# EAGLE board CT_schematic (EAGLE 7.6.0)

Size 100 x 80 mm. Coordinates in mm from the lower left corner, seen from the top.
Outline: 0,0 100,0 100,80 0,80 0,0
Copper layers (1*16): Top 0.035mm / dielectric 1.5mm / Bottom 0.035mm
Design rules "default": minimum track width 10mil, minimum drill 24mil, track to track 8mil, track to pad 8mil, pad to pad 8mil, via to via 8mil, smd to smd 8mil, copper to edge 40mil, drill to drill 8mil, minimum pad ring 10mil, minimum via ring 8mil, stop-mask expansion 4mil, vias tented up to drill 0mil, thermal gap 10mil

## Footprints (pad centres in the part's own frame; a part is rotated, then mirrored left to right if it is on the bottom)
C0603 = smd 0.8 x 0.8: 1 -0.762,0; 2 0.762,0
C0402 = smd 0.5 x 0.5: 1 -0.508,0; 2 0.508,0
C0805 = smd 1.2 x 1.3: 1 -1.016,0; 2 1.016,0
EXV-9B = smd 2.718 x 1.778: 1 -2.108,0; 2 2.108,0
EXV-9H = smd 3.505 x 1.676: 1 -2.857,0; 2 2.857,0
L0603 = smd 0.8 x 0.8: 1 -0.762,0; 2 0.762,0
L1210 = smd 1.2 x 2.5: 1 -1.524,0; 2 1.524,0
PJ-037B_PACKAGE = drill 3.7 square: 1 12,0 | drill 3.2 square: 2 6,0
R0603 = smd 0.8 x 0.8: 1 -0.762,0; 2 0.762,0
TFBGA64 = smd 0.35 x 0.35: A1 -1.75,1.75; A2 -1.25,1.75; A3 -0.75,1.75; A4 -0.25,1.75; A5 0.25,1.75; A6 0.75,1.75; A7 1.25,1.75; A8 1.75,1.75; B1 -1.75,1.25; B2 -1.25,1.25; B3 -0.75,1.25; B4 -0.25,1.25; B5 0.25,1.25; B6 0.75,1.25; B7 1.25,1.25; B8 1.75,1.25; C1 -1.75,0.75; C2 -1.25,0.75; C3 -0.75,0.75; C4 -0.25,0.75; C5 0.25,0.75; C6 0.75,0.75; C7 1.25,0.75; C8 1.75,0.75; D1 -1.75,0.25; D2 -1.25,0.25; D3 -0.75,0.25; D4 -0.25,0.25; D5 0.25,0.25; D6 0.75,0.25; D7 1.25,0.25; D8 1.75,0.25; E1 -1.75,-0.25; E2 -1.25,-0.25; E3 -0.75,-0.25; E4 -0.25,-0.25; E5 0.25,-0.25; E6 0.75,-0.25; E7 1.25,-0.25; E8 1.75,-0.25; F1 -1.75,-0.75; F2 -1.25,-0.75; F3 -0.75,-0.75; F4 -0.25,-0.75; F5 0.25,-0.75; F6 0.75,-0.75; F7 1.25,-0.75; F8 1.75,-0.75; G1 -1.75,-1.25; G2 -1.25,-1.25; G3 -0.75,-1.25; G4 -0.25,-1.25; G5 0.25,-1.25; G6 0.75,-1.25; G7 1.25,-1.25; G8 1.75,-1.25; H1 -1.75,-1.75; H2 -1.25,-1.75; H3 -0.75,-1.75; H4 -0.25,-1.75; H5 0.25,-1.75; H6 0.75,-1.75; H7 1.25,-1.75; H8 1.75,-1.75
SSOP-20 = smd 1.651 x 0.432: 1 -3.48,2.925; 2 -3.48,2.275; 3 -3.48,1.625; 4 -3.48,0.975; 5 -3.48,0.325; 6 -3.48,-0.325; 7 -3.48,-0.975; 8 -3.48,-1.625; 9 -3.48,-2.275; 10 -3.48,-2.925; 11 3.48,-2.925; 12 3.48,-2.275; 13 3.48,-1.625; 14 3.48,-0.975; 15 3.48,-0.325; 16 3.48,0.325; 17 3.48,0.975; 18 3.48,1.625; 19 3.48,2.275; 20 3.48,2.925
HTSS-105-01-G-D = drill 1 pad 1.8 square: 1 0,0 | drill 1 pad 1.8: 2 0,2.54; 3 2.54,0; 4 2.54,2.54; 5 5.08,0; 6 5.08,2.54; 7 7.62,0; 8 7.62,2.54; 9 10.16,0; 10 10.16,2.54
TSSOP20-I = smd 0.4 x 1.35: 1 -2.925,-2.875; 2 -2.275,-2.875; 3 -1.625,-2.875; 4 -0.975,-2.875; 5 -0.325,-2.875; 6 0.325,-2.875; 7 0.975,-2.875; 8 1.625,-2.875; 9 2.275,-2.875; 10 2.925,-2.875; 11 2.925,2.875; 12 2.275,2.875; 13 1.625,2.875; 14 0.975,2.875; 15 0.325,2.875; 16 -0.325,2.875; 17 -0.975,2.875; 18 -1.625,2.875; 19 -2.275,2.875; 20 -2.925,2.875
ABS07-32.768KHZ-7-T = smd 1.1 x 2.4: 1 -2.5,0; 2 0,0
ASFL1 = smd 1.7 x 1.5: 1 -1.27,-1.1; 2 1.27,-1.1; 3 1.27,1.1; 4 -1.27,1.1
LP2954 = smd 1.6 x 0.6: 1 -2.475,1.905 | smd 1.55 x 0.6: 2 -2.475,0.635; 3 -2.475,-0.635; 4 -2.475,-1.905; 5 2.475,-1.905; 6 2.475,-0.635; 7 2.475,0.635; 8 2.475,1.905
SON-6 = smd 0.55 x 0.3: 1 -0.355,0.5 | smd 0.52 x 0.3: 2 -0.37,0; 3 -0.37,-0.5; 4 0.37,-0.5; 5 0.37,0; 6 0.37,0.5
SW_4-1437565-2 = smd 1.4 x 2.1: 1 -2.23,4.55; 2 -2.23,-4.55; 3 2.23,4.55; 4 2.23,-4.55
LGM67K-G1J2-24-Z = smd 0.8 x 1.4: A -2,0; C 0,0
NC7SZ125M5X = smd 1.3 x 0.7: 1 -1.3,0.95; 2 -1.3,0; 3 -1.3,-0.95; 4 1.3,-0.95; 5 1.3,0.95
DUMMY_PACKAGE_119 = drill 0.3: 1 0,-1; 2 1.5,-1; 3 3,-1

## Placement (x,y rotation side)
C1  1e-07  [C0603]  -22.86,58.42 0 top  (outside the outline)
C2  1e-07  [C0603]  -26.67,58.42 0 top  (outside the outline)
C3  1e-07  [C0603]  -30.48,58.42 0 top  (outside the outline)
C4  1e-07  [C0603]  -34.29,58.42 0 top  (outside the outline)
C5  4.7e-06  [C0603]  -19.05,58.42 0 top  (outside the outline)
C6  1e-07  [C0603]  -38.1,58.42 0 top  (outside the outline)
C7  1e-08  [C0603]  -41.91,58.42 0 top  (outside the outline)
C8  1e-06  [C0603]  -45.72,58.42 0 top  (outside the outline)
C9  1e-11  [C0402]  -22.86,63.5 0 top  (outside the outline)
C10  1e-11  [C0402]  -26.67,63.5 0 top  (outside the outline)
C11  1e-06  [C0603]  -49.53,58.42 0 top  (outside the outline)
C12  1e-06  [C0603]  -53.34,58.42 0 top  (outside the outline)
C13  1e-06  [C0603]  -57.15,58.42 0 top  (outside the outline)
C14  4.7e-06  [C0805]  -59.69,45.72 0 top  (outside the outline)
C15  1e-07  [C0402]  -30.48,63.5 0 top  (outside the outline)
C16  1e-07  [C0402]  -34.29,63.5 0 top  (outside the outline)
C17  1e-07  [C0402]  -38.1,63.5 0 top  (outside the outline)
C18  1e-07  [C0402]  -41.91,63.5 0 top  (outside the outline)
C19  1e-07  [C0402]  -45.72,63.5 0 top  (outside the outline)
C20  1e-07  [C0402]  -49.53,63.5 0 top  (outside the outline)
C21  1e-08  [C0402]  -53.34,63.5 0 top  (outside the outline)
C22  1e-06  [EXV-9B]  -36.83,45.72 0 top  (outside the outline)
C23  2.2e-06  [EXV-9B]  -45.72,45.72 0 top  (outside the outline)
C24  1e-07  [C0402]  -57.15,63.5 0 top  (outside the outline)
C25  0.0001  [EXV-9H]  -17.78,39.37 0 top  (outside the outline)
C26  0.0001  [EXV-9H]  -29.21,39.37 0 top  (outside the outline)
C27  1e-08  [C0402]  -60.96,63.5 0 top  (outside the outline)
F1  240.0  [L0603]  -60.96,58.42 0 top  (outside the outline)
I1  1.5e-05  [L1210]  -29.21,46.99 0 top  (outside the outline)
J1  PJ-037B  [PJ-037B_PACKAGE]  -27.94,7.62 0 top  (outside the outline)
R2  1000.0  [R0603]  -64.77,58.42 0 top  (outside the outline)
R4  4700.0  [R0603]  -15.24,63.5 0 top  (outside the outline)
R5  10000.0  [R0603]  -55.88,53.34 0 top  (outside the outline)
R6  100000.0  [R0603]  -15.24,53.34 0 top  (outside the outline)
R7  100000.0  [R0603]  -20.32,53.34 0 top  (outside the outline)
R8  100000.0  [R0603]  -25.4,53.34 0 top  (outside the outline)
R9  100000.0  [R0603]  -30.48,53.34 0 top  (outside the outline)
R10  100000.0  [R0603]  -35.56,53.34 0 top  (outside the outline)
R11  164658.62  [R0603]  -64.77,45.72 0 top  (outside the outline)
R12  100000.0  [R0603]  -40.64,53.34 0 top  (outside the outline)
R13  10000.0  [R0603]  -60.96,53.34 0 top  (outside the outline)
R14  10000.0  [R0603]  -15.24,58.42 0 top  (outside the outline)
R15  9100.0  [R0603]  -19.05,63.5 0 top  (outside the outline)
R16  680000.0  [R0603]  -45.72,53.34 0 top  (outside the outline)
R17  120000.0  [R0603]  -50.8,53.34 0 top  (outside the outline)
U1  STM32L152R8H6  [TFBGA64]  -62.23,19.05 0 top  (outside the outline)
U2  MAX3218EAP+T  [SSOP-20]  -35.56,29.21 0 top  (outside the outline)
U3  HTSS-105-01-G-D  [HTSS-105-01-G-D]  -27.94,19.05 0 top  (outside the outline)
U4  SP3203ECY-L/TR  [TSSOP20-I]  -59.69,6.35 0 top  (outside the outline)
U5  HTSS-105-01-G-D  [HTSS-105-01-G-D]  -46.99,19.05 0 top  (outside the outline)
U6  ABS07-32.768KHZ-7-T  [ABS07-32.768KHZ-7-T]  -50.8,39.37 0 top  (outside the outline)
U7  ASFL1-25MHZ-NCS  [ASFL1]  -54.61,29.21 0 top  (outside the outline)
U8  LP2954AIMX/NOPB  [LP2954]  -25.4,30.48 0 top  (outside the outline)
U9  TPS3895ADRYR  [SON-6]  -20.32,67.31 0 top  (outside the outline)
U10  4-1437565-2  [SW_4-1437565-2]  -44.45,6.35 0 top  (outside the outline)
U11  Q65110A2395  [LGM67K-G1J2-24-Z]  -17.78,46.99 0 top  (outside the outline)
U12  nc7sz125m5x  [NC7SZ125M5X]  -53.34,45.72 0 top  (outside the outline)
U13  Dummy  [DUMMY_PACKAGE_119]  -17.78,68.58 0 top  (outside the outline)

## Library data of the parts
C1-C27 F1 I1 J1 R2 R4-R17 U1-U13 = circuit_tree

## Nets
CLK_CRYSTAL_U1_A1: C9.1 U1.A1 U6.1
CLK_CRYSTAL_U1_B1: C10.1 U1.B1 U6.2
CLK_U1_C1: U1.C1 U7.3
GND: C1.2 C2.2 C3.2 C4.2 C5.2 C6.2 C7.2 C8.2 C9.2 C10.2 C11.2 C12.2 C13.2 C15.2 C16.2 C19.2 C20.2 C21.2 C22.2 C23.2 C24.2 C25.2 C26.2 C27.2 J1.2 R2.2 R5.2 R12.2 R15.2 R17.2 U1.C2 U1.D4 U1.D5 U1.D6 U1.F1 U2.5 U2.17 U2.20 U3.9 U4.18 U5.9 U7.2 U8.4 U9.2 U11.C U12.1 U12.3 U13.1
NET_U1_B2: C6.1 U1.B2
NET_U1_B4: R5.1 U1.B4
NET_U1_E1: R4.1 U1.E1 U12.4
NET_U1_H1: C7.1 C8.1 F1.1 U1.G1 U1.H1
NET_U1_H7: U11.A
NET_U1_H8: U10.3 U10.4
NET_U2_1: I1.1 U2.1
NET_U2_2: R6.1 U2.2
NET_U2_3: R7.1 U2.3
NET_U2_4: R8.1 U2.4
NET_U2_15: C13.1 U2.15
NET_U2_16: C14.2 U2.16
NET_U2_18: C14.1 U2.18
NET_U2_19: C12.1 U2.19
NET_U3_3: U2.12 U3.3
NET_U3_4: U2.11 U3.4
NET_U3_5: U2.14 U3.5
NET_U3_6: U2.13 U3.6
NET_U4_1: C17.1 U4.1
NET_U4_2: C19.1 U4.2
NET_U4_3: C17.2 U4.3
NET_U4_4: C18.1 U4.4
NET_U4_5: C18.2 U4.5
NET_U4_6: C20.1 U4.6
NET_U4_20: U4.20
NET_U5_3: U4.14 U5.3
NET_U5_4: U4.13 U5.4
NET_U5_5: U4.17 U5.5
NET_U5_6: U4.16 U5.6
NET_U8_3: R10.1 U8.3
NET_U8_5: R9.1 U8.5
NET_U8_7: R11.2 R12.1 U8.7
NET_U9_1: R14.1 R15.1 U9.1
NET_U9_3: R16.2 R17.1 U9.3
NET_U9_4: R13.1 U9.4 U12.2
NET_U10_1: R2.1 U10.1 U10.2
PROC_PB9: U1.A3 U13.3
PROC_PC13_WKUP2: U1.A2 U13.2
PROC_USART1_CTS: U1.C8 U2.8
PROC_USART1_RTS: U1.B8 U2.10
PROC_USART1_RX: U1.C3 U2.9
PROC_USART1_TX: U1.C7 U2.7
PROC_USART2_CTS: U1.G2 U4.8
PROC_USART2_RTS: U1.H2 U4.10
PROC_USART2_RX: U1.G3 U4.11
PROC_USART2_TX: U1.F3 U4.7
VCC_S1_6V7: C22.1 C25.1 C26.1 J1.1 R10.2 U8.8
VCC_TIER1_3V3: C1.1 C2.1 C3.1 C4.1 C5.1 C11.1 C15.1 C16.1 C21.1 C23.1 C24.1 C27.1 F1.2 I1.2 R4.2 R6.2 R7.2 R8.2 R9.2 R11.1 R13.2 R14.2 R16.1 U1.D2 U1.E4 U1.E5 U1.E6 U2.6 U4.12 U4.19 U7.4 U8.1 U9.6 U12.5

## Tracks (layer width: path | path; a pad name or v marks a point on that pad's centre or on a via)
CLK_CRYSTAL_U1_A1  (2 unrouted)
CLK_CRYSTAL_U1_B1  (2 unrouted)
CLK_U1_C1  (1 unrouted)
GND  (47 unrouted)
NET_U1_B2  (1 unrouted)
NET_U1_B4  (1 unrouted)
NET_U1_E1  (2 unrouted)
NET_U1_H1  (4 unrouted)
NET_U1_H8  (1 unrouted)
NET_U2_1  (1 unrouted)
NET_U2_2  (1 unrouted)
NET_U2_3  (1 unrouted)
NET_U2_4  (1 unrouted)
NET_U2_15  (1 unrouted)
NET_U2_16  (1 unrouted)
NET_U2_18  (1 unrouted)
NET_U2_19  (1 unrouted)
NET_U3_3  (1 unrouted)
NET_U3_4  (1 unrouted)
NET_U3_5  (1 unrouted)
NET_U3_6  (1 unrouted)
NET_U4_1  (1 unrouted)
NET_U4_2  (1 unrouted)
NET_U4_3  (1 unrouted)
NET_U4_4  (1 unrouted)
NET_U4_5  (1 unrouted)
NET_U4_6  (1 unrouted)
NET_U5_3  (1 unrouted)
NET_U5_4  (1 unrouted)
NET_U5_5  (1 unrouted)
NET_U5_6  (1 unrouted)
NET_U8_3  (1 unrouted)
NET_U8_5  (1 unrouted)
NET_U8_7  (2 unrouted)
NET_U9_1  (2 unrouted)
NET_U9_3  (2 unrouted)
NET_U9_4  (2 unrouted)
NET_U10_1  (2 unrouted)
PROC_PB9  (1 unrouted)
PROC_PC13_WKUP2  (1 unrouted)
PROC_USART1_CTS  (1 unrouted)
PROC_USART1_RTS  (1 unrouted)
PROC_USART1_RX  (1 unrouted)
PROC_USART1_TX  (1 unrouted)
PROC_USART2_CTS  (1 unrouted)
PROC_USART2_RTS  (1 unrouted)
PROC_USART2_RX  (1 unrouted)
PROC_USART2_TX  (1 unrouted)
VCC_S1_6V7  (5 unrouted)
VCC_TIER1_3V3  (33 unrouted)